# EAGLE board USAF Design (EAGLE 5.11)
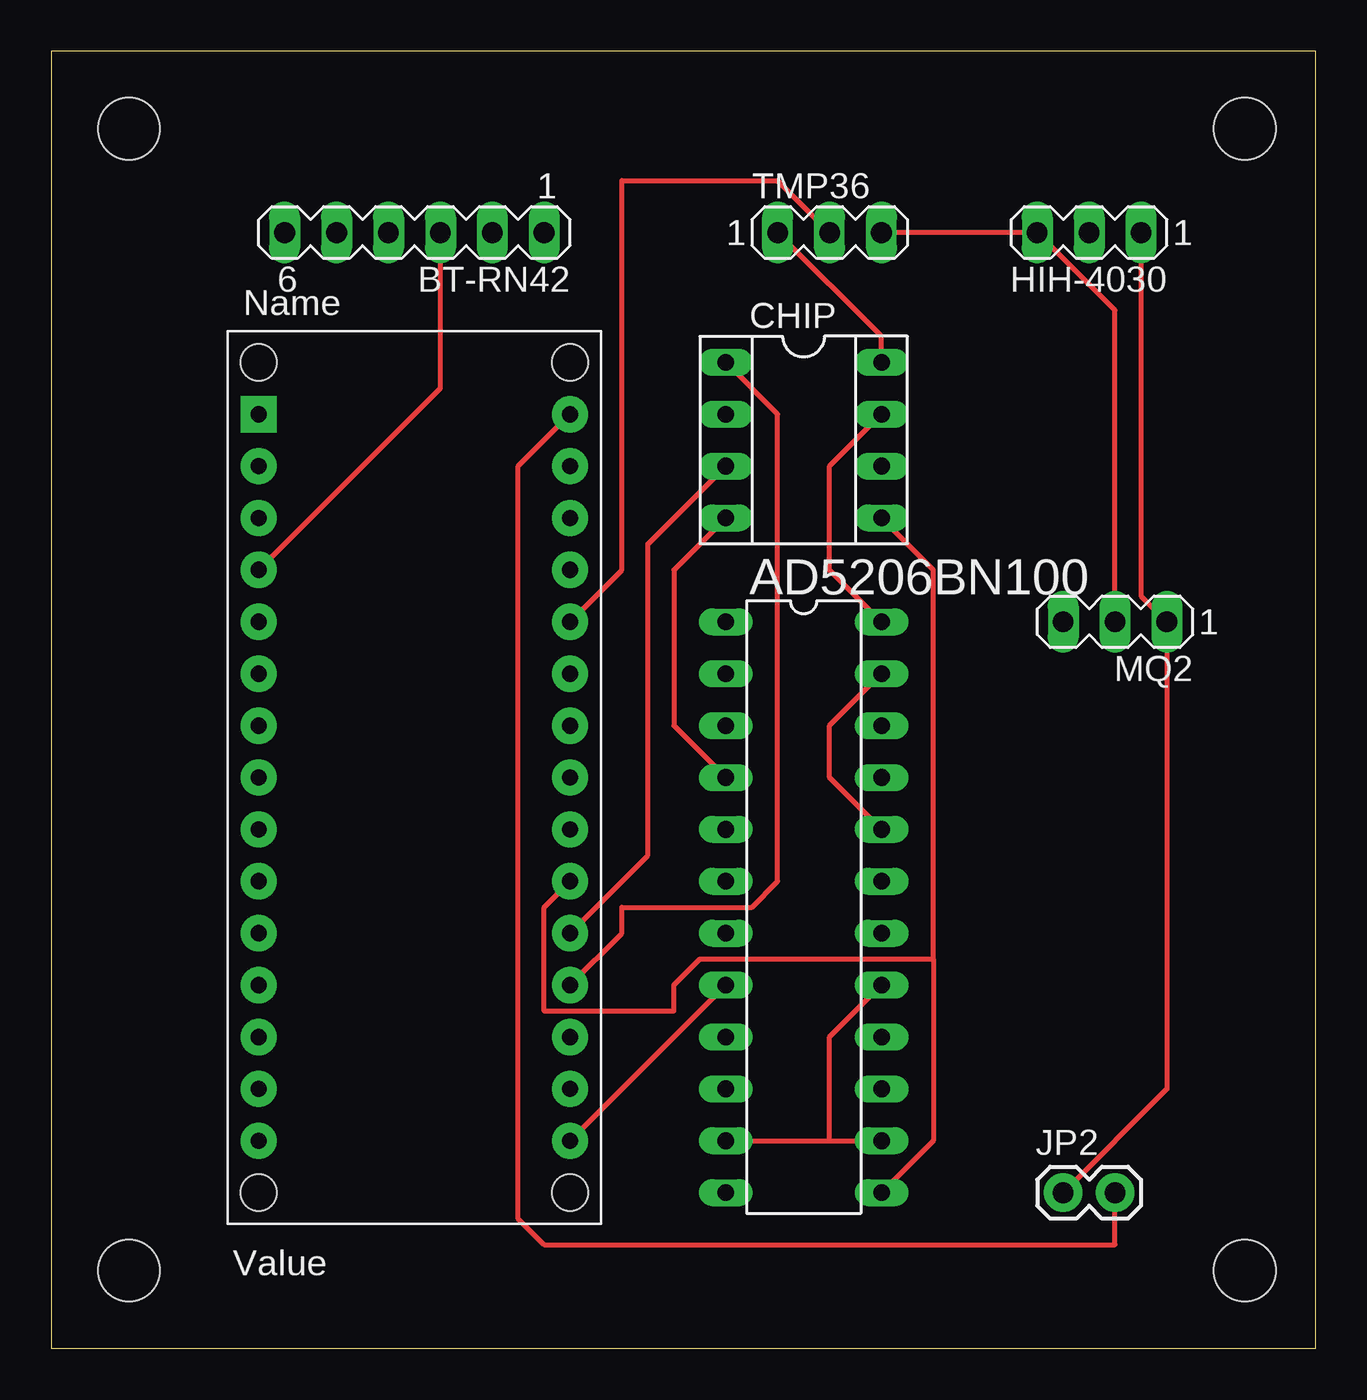
[diagram p0: board, top side]
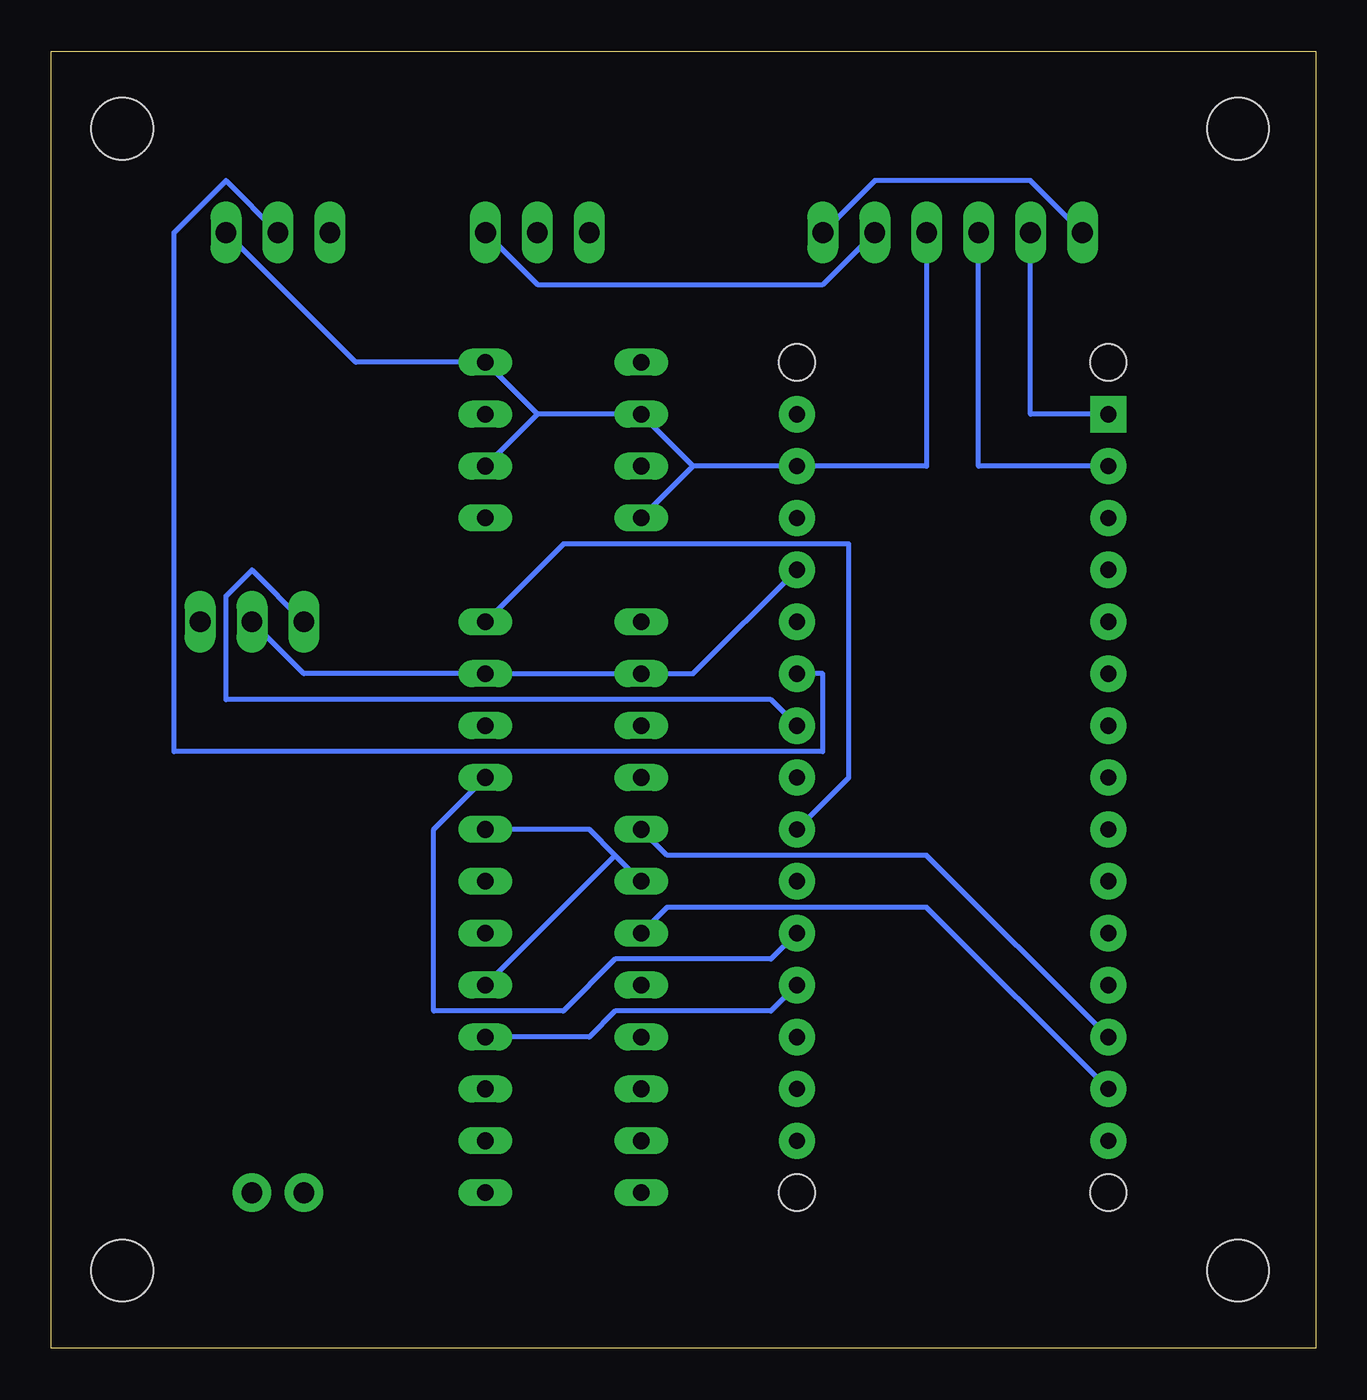
[diagram p1: board, bottom side, seen from below]

Size 61.9 x 63.49 mm. Coordinates in mm from the lower left corner, seen from the top.
Outline: 0,0 61.9,0 61.9,63.49 0,63.49 0,0
Copper layers (1*16): Top 0.035mm / dielectric 1.5mm / Bottom 0.035mm
Design rules "default": minimum track width 10mil, minimum drill 24mil, track to track 8mil, track to pad 8mil, pad to pad 8mil, via to via 8mil, smd to smd 8mil, copper to edge 40mil, drill to drill 8mil, minimum pad ring 10mil, minimum via ring 8mil, stop-mask expansion 4mil, vias tented up to drill 0mil, thermal gap 10mil
Holes 3.02 mm at 3.81,59.69 58.42,59.69 3.81,3.81 58.42,3.81

## Footprints (pad centres in the part's own frame; a part is rotated, then mirrored left to right if it is on the bottom)
DIL24-3 = drill 0.813 long: 1 -13.97,-3.81; 2 -11.43,-3.81; 3 -8.89,-3.81; 4 -6.35,-3.81; 5 -3.81,-3.81; 6 -1.27,-3.81; 7 1.27,-3.81; 8 3.81,-3.81; 9 6.35,-3.81; 10 8.89,-3.81; 11 11.43,-3.81; 12 13.97,-3.81; 13 13.97,3.81; 14 11.43,3.81; 15 8.89,3.81; 16 6.35,3.81; 17 3.81,3.81; 18 1.27,3.81; 19 -1.27,3.81; 20 -3.81,3.81; 21 -6.35,3.81; 22 -8.89,3.81; 23 -11.43,3.81; 24 -13.97,3.81
MA06-1 = drill 1.016 long: 1 -6.35,0; 2 -3.81,0; 3 -1.27,0; 4 1.27,0; 5 3.81,0; 6 6.35,0
SOCKET-08 = drill 0.813 long: 1 -3.81,-3.81; 2 -1.27,-3.81; 3 1.27,-3.81; 4 3.81,-3.81; 5 3.81,3.81; 6 1.27,3.81; 7 -1.27,3.81; 8 -3.81,3.81
MA03-1 = drill 1.016 long: 1 -2.54,0; 2 0,0; 3 2.54,0
1X02 = drill 1.016 pad 1.88 round: 1 0,0; 2 2.54,0
PDIP-32 = drill 0.8 pad 1.778 round: 3V3 15.24,-35.56; +5V 15.24,-10.16; A0 15.24,-12.7; A1 15.24,-15.24; A2 15.24,-17.78; A3 15.24,-20.32; A4 15.24,-22.86; A5 15.24,-25.4; A6 15.24,-27.94; A7 15.24,-30.48; AREF 15.24,-33.02; D0/RX 0,-5.08; D2 0,-12.7; D3 0,-15.24; D4 0,-17.78; D5 0,-20.32; D6 0,-22.86; D7 0,-25.4; D8 0,-27.94; D9 0,-30.48; D10 0,-33.02; D11 0,-35.56; D12 0,-38.1; D13 15.24,-38.1; GND 0,-10.16; GND1 15.24,-5.08; RESET 0,-7.62; RESET1 15.24,-7.62; VIN 15.24,-2.54 | drill 0.8 pad 1.778 square: D1/TX 0,-2.54 | hole 1.778: 0,0; 0,-40.64; 15.24,-40.64; 15.24,0

## Placement (x,y rotation side)
AD5206BN100  [DIL24-3]  36.83,21.59 270 top
BT-RN42  [MA06-1]  17.78,54.61 180 top
CHIP  [SOCKET-08]  36.83,44.45 270 top
HIH-4030  [MA03-1]  50.8,54.61 180 top
JP2  [1X02]  49.53,7.62 0 top
MQ2  [MA03-1]  52.07,35.56 180 top
TMP36  [MA03-1]  38.1,54.61 0 top
U$1  ARDUINONANO  [PDIP-32]  10.16,48.26 0 top

## Library data of the parts
AD5206BN100 CHIP = ic-package
BT-RN42 HIH-4030 MQ2 TMP36 = con-lstb; OC_FARNELL: unknown; OC_NEWARK: unknown
JP2 = SparkFun
U$1 = jet-lib

## Nets
5V: AD5206BN100.2 AD5206BN100.6 AD5206BN100.11 AD5206BN100.14 AD5206BN100.17 AD5206BN100.20 AD5206BN100.23 BT-RN42.2 HIH-4030.3 MQ2.2 TMP36.3 U$1.+5V
ADC0: AD5206BN100.16 CHIP.1 U$1.A7
ADC1: AD5206BN100.21 CHIP.3 U$1.A6
ADC2: AD5206BN100.13 CHIP.5 U$1.A5
ADC3: AD5206BN100.24 CHIP.7 U$1.A4
ADC4: U$1.A3
ADC5: MQ2.3 U$1.A2
ADC6: HIH-4030.2 U$1.A1
ADC7: TMP36.2 U$1.A0
ARDRX: BT-RN42.4 U$1.D0/RX
ARDTX: BT-RN42.5 U$1.D1/TX
CTS-RTS: BT-RN42.1 BT-RN42.6
GND: AD5206BN100.4 BT-RN42.3 CHIP.2 CHIP.4 CHIP.6 CHIP.8 HIH-4030.1 JP2.1 MQ2.1 TMP36.1 U$1.GND U$1.GND1
MOSI: AD5206BN100.7 U$1.D11
SCK: AD5206BN100.8 U$1.D13
SS: AD5206BN100.5 U$1.D10
VIN: JP2.2 U$1.VIN

## Tracks (layer width: path | path; a pad name or v marks a point on that pad's centre or on a via)
5V
  Top 0.254: AD5206BN100.11 38.1,10.16 | 38.1,10.16 AD5206BN100.14 | TMP36.3 HIH-4030.3 52.07,50.8 MQ2.2 | AD5206BN100.17 38.1,15.24 38.1,10.16 | AD5206BN100.20 38.1,27.94 38.1,30.48 AD5206BN100.23
  Bottom 0.254: BT-RN42.2 24.13,52.07 38.1,52.07 TMP36.3 | 34.29,24.13 35.56,25.4 AD5206BN100.20 | 34.29,24.13 AD5206BN100.6 | AD5206BN100.17 34.29,24.13 | MQ2.2 49.53,33.02 AD5206BN100.23 AD5206BN100.2 30.48,33.02 U$1.+5V
ADC0
  Top 0.254: CHIP.1 35.56,45.72 35.56,22.86 34.29,21.59 27.94,21.59 27.94,20.32 U$1.A7
  Bottom 0.254: AD5206BN100.16 35.56,15.24 34.29,16.51 26.67,16.51 U$1.A7
ADC1
  Top 0.254: CHIP.3 29.21,39.37 29.21,24.13 U$1.A6
  Bottom 0.254: AD5206BN100.21 43.18,25.4 43.18,16.51 36.83,16.51 34.29,19.05 26.67,19.05 U$1.A6
ADC2
  Top 0.254: AD5206BN100.13 43.18,10.16 43.18,19.05 | 43.18,19.05 43.18,38.1 CHIP.5 | U$1.A5 24.13,21.59 24.13,16.51 30.48,16.51 30.48,17.78 31.75,19.05 43.18,19.05
ADC3
  Top 0.254: AD5206BN100.24 38.1,38.1 38.1,43.18 CHIP.7
  Bottom 0.254: U$1.A4 22.86,27.94 22.86,39.37 36.83,39.37 AD5206BN100.24
ADC5
  Bottom 0.254: MQ2.3 52.07,38.1 53.34,36.83 53.34,31.75 26.67,31.75 U$1.A2
ADC6
  Bottom 0.254: HIH-4030.2 53.34,57.15 55.88,54.61 55.88,29.21 24.13,29.21 24.13,33.02 U$1.A1
ADC7
  Top 0.254: TMP36.2 35.56,57.15 27.94,57.15 27.94,38.1 U$1.A0
ARDRX
  Bottom 0.254: BT-RN42.4 16.51,43.18 U$1.D0/RX
ARDTX
  Bottom 0.254: BT-RN42.5 13.97,45.72 U$1.D1/TX
CTS-RTS
  Bottom 0.254: BT-RN42.6 13.97,57.15 21.59,57.15 BT-RN42.1
GND
  Top 0.254: AD5206BN100.4 30.48,30.48 30.48,38.1 CHIP.4 | TMP36.1 40.64,49.53 CHIP.8 | HIH-4030.1 53.34,36.83 MQ2.1 54.61,12.7 JP2.1 | U$1.GND 19.05,46.99 BT-RN42.3
  Bottom 0.254: 30.48,43.18 CHIP.2 38.1,45.72 | 30.48,43.18 U$1.GND1 19.05,43.18 BT-RN42.3 | 38.1,45.72 CHIP.6 | 38.1,45.72 CHIP.8 46.99,48.26 HIH-4030.1 | 30.48,43.18 CHIP.4
MOSI
  Bottom 0.254: AD5206BN100.7 31.75,21.59 19.05,21.59 U$1.D11
SCK
  Top 0.254: U$1.D13 AD5206BN100.8
SS
  Bottom 0.254: AD5206BN100.5 31.75,24.13 19.05,24.13 U$1.D10
VIN
  Top 0.254: U$1.VIN 22.86,43.18 22.86,6.35 24.13,5.08 52.07,5.08 JP2.2